# Altium PCB ersa_board_b.PcbDoc
Units mm, origin at the board's own origin, x right, y up, seen from the top; angles counter-clockwise.
Board outline 29 x 81.5 mm, 2 copper layers (Top Layer, Bottom Layer); 69 components, 63 nets, 232 pads, 80 vias.
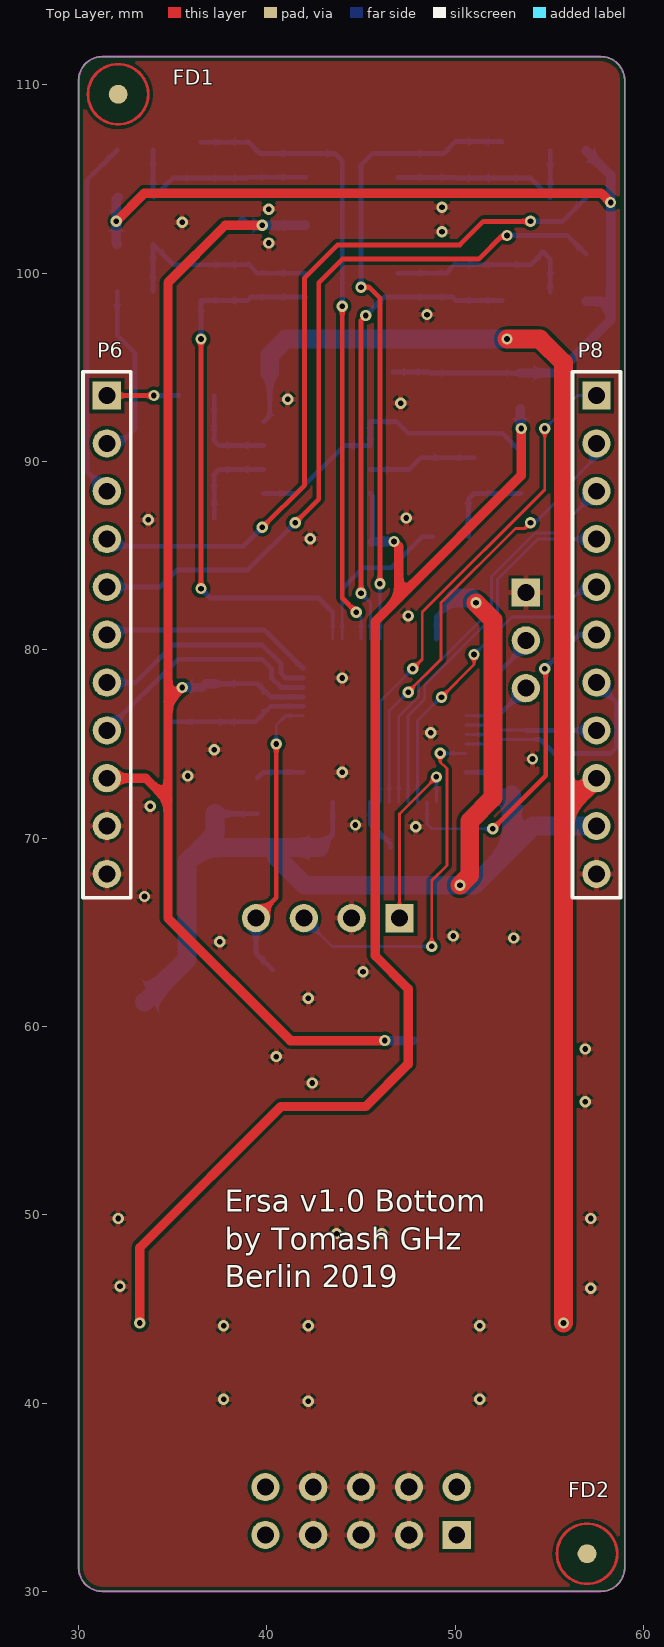
[diagram p0: Top Layer view]
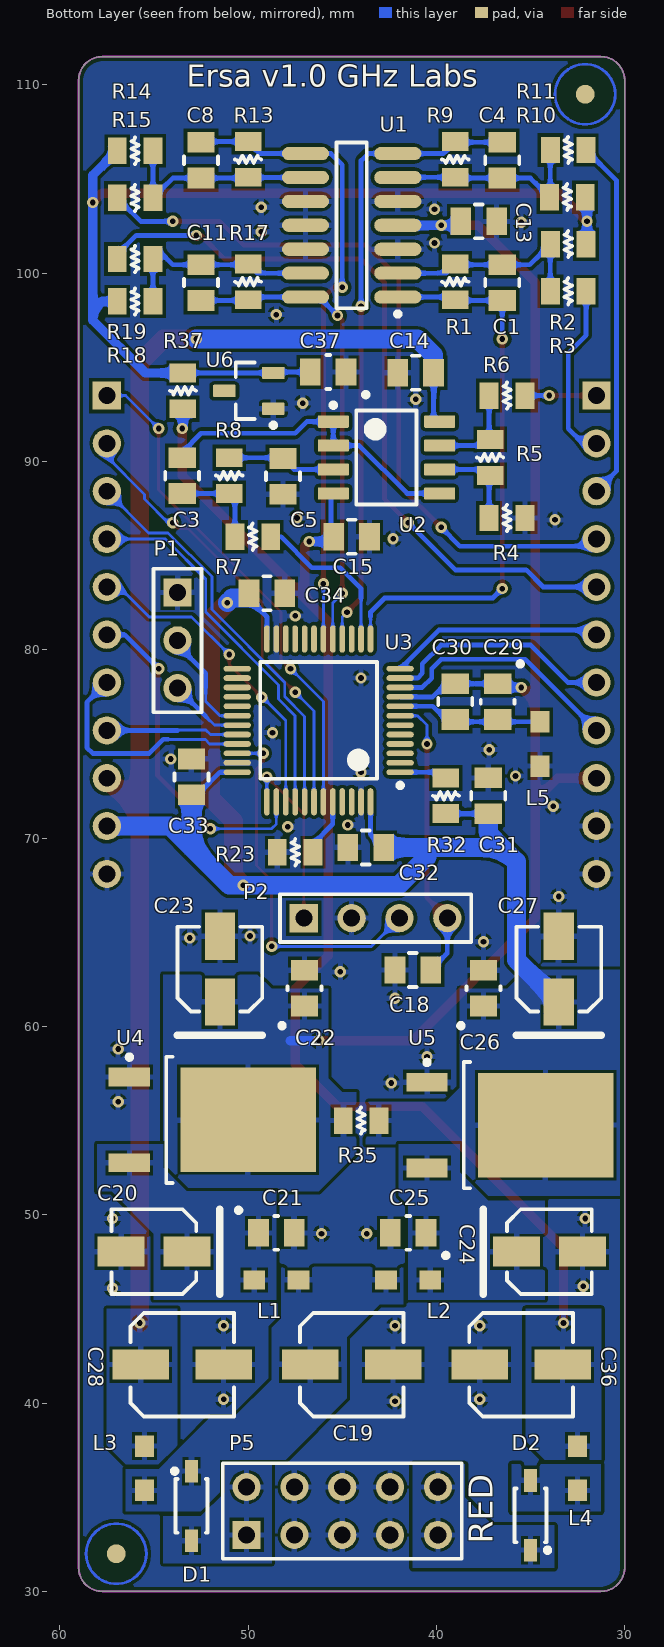
[diagram p1: Bottom Layer view, seen from below]
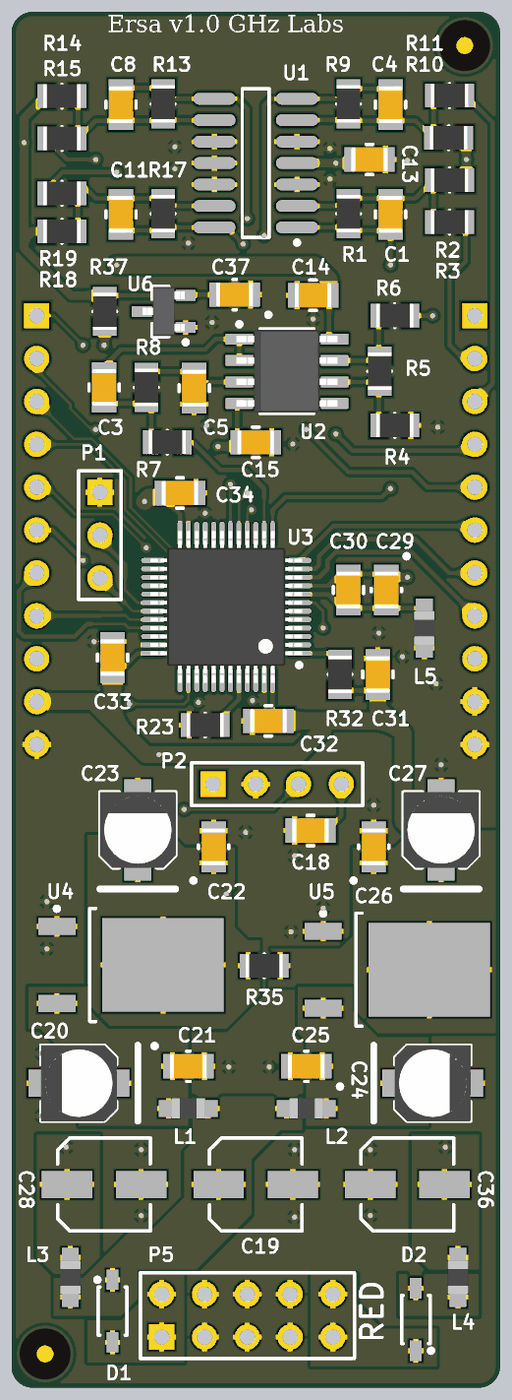
[diagram p2: 3D render of the assembled board from below, using the file's embedded part models]

## Layer stack, top to bottom
Top Solder: solder mask 0.0102, Solder Resist, Dk 3.5
Top Layer: signal copper 0.0356
Dielectric 1: dielectric 0.32, FR-4, Dk 4.8
Bottom Layer: signal copper 0.0356
Bottom Solder: solder mask 0.0102, Solder Resist, Dk 3.5

## Board outline
30,31.27 30,110.23 cw(c31.27,110.23) 31.27,111.5 57.73,111.5 cw(c57.73,110.23) 59,110.23 59,31.27 cw(c57.73,31.27) 57.73,30 31.27,30 cw(c31.27,31.27)

## Design rules (kind name [scope] priority, off if disabled: settings)
BoardOutlineClearance [All] p1: gap=0.254 ignorepadtopadclearanceinfootprint=FALSE except(0: Arc-SplitContinuation Track-SplitContinuation SMDPad-SplitContinuation THPad-SplitContinuation Via-SplitContinuation Fill-SplitContinuation Poly-SplitContinuation Region-SplitContinuation Text-SplitContinuation)
Clearance [All] p1: gap=0.18 ignorepadtopadclearanceinfootprint=FALSE
ComponentClearance [All] p1 off: gap=0.254 collisioncheckmode=3 verticalgap=0.254 showdistances=FALSE
HoleSize [All] p1: absolutevalues=TRUE maxlimit=6.3 minlimit=0.3 maxpercent=80.000 minpercent=20.000
MinimumAnnularRing [All] p1: minimumring=0.15
MinimumSolderMaskSliver [All] p1: minsoldermaskwidth=0.15
PlaneConnect [All] p1: planeconnectstyle=Direct reliefexpansion=0.508 reliefentries=4 reliefconductorwidth=0.254 reliefairgap=0.254
PolygonConnect [All] p1: connectstyle=Relief reliefconductorwidth=0.3 reliefentries=4 polygonreliefangle="90 Angle" airgapwidth=0.15
RoutingVias [All] p1: holewidth=0.3 width=0.6 viastyle="Through Hole" minholewidth=0.3 minwidth=0.6 maxholewidth=0.3 maxwidth=0.6
SilkToSilkClearance [All] p1 off: silktosilkclearance=0.254
SilkToSolderMaskClearance [IsPad] p1 off: minsilkscreentomaskgap=0.254 clearancetoexposedcopper=TRUE
SolderMaskExpansion [All] p1: expansion=0.102
UnConnectedPin [All] p1:
Width [All] p1: maxlimit=1 minlimit=0.15 preferedwidth=0.254
24 further rules are at their usual default settings.

## Classes and differential pairs
component class ersa_schematics_digital: C18 C19 C20 C21 C22 C23 C24 C25 C26 C27 C28 C29 C30 C31 C32 C33 C34 C36 C37 D1 D2 FD1 FD2 L1 L2 L3 L4 L5 P1 P2 P5 P6 P8 R23 R32 R35 R37 U4 U5 U6
component class ersa_schematics_analog: C1 C3 C4 C5 C8 C11 C13 C14 C15 R1 R2 R3 R4 R5 R6 R7 R8 R9 R10 R11 R13 R14 R15 R17 R18 R19 U1 U2

## Components (designator, comment, footprint, x,y, rotation, side; value= is the part's Value field where it differs from the comment)
C1 "20pF" CAPA_0805 36.5,99.5 r270 bottom
C3 "1nF" CAPA_0805 53.5,89.25 r90 bottom
C4 "20pF" CAPA_0805 36.5,106 r90 bottom
C5 "1nF" CAPA_0805 48.15,89.21 r90 bottom
C8 "20pF" CAPA_0805 52.5,106 r90 bottom
C11 "20pF" CAPA_0805 52.5,99.5 r270 bottom
C13 "100nF" CAPA_0805 37.75,102.75 r180 bottom
C14 "100nF" CAPA_0805 41.1,94.71 r0 bottom
C15 "100nF" CAPA_0805 44.5,86 r180 bottom
C18 "100nF" CAPA_0805 41.25,63 r0 bottom
C19 "UUD1C220MCL1GS" NIC-CAPA2-5X5.8_V 44.5,42.04 r180 bottom
C20 "EEE-FK1V100UR" PNSC-FK-V-B_V 55,48.04 r0 bottom
C21 "1uF" "CAPA_0805 Pol" 48.5,49.04 r180 bottom
C22 "1uF" "CAPA_0805 Pol" 47,62.04 r90 bottom
C23 "EEE-FK1V100UR" PNSC-FK-V-B_V 51.5,63.04 r90 bottom
C24 "EEE-FK1V100UR" PNSC-FK-V-B_V 34,48.04 r180 bottom
C25 "1uF" "CAPA_0805 Pol" 41.5,49.04 r0 bottom
C26 "1uF" "CAPA_0805 Pol" 37.5,62.04 r90 bottom
C27 "EEE-FK1V100UR" PNSC-FK-V-B_V 33.5,63.04 r90 bottom
C28 "UUD1C220MCL1GS" NIC-CAPA2-5X5.8_V 53.5,42.04 r180 bottom
C29 "1uF" "CAPA_0805 Pol" 36.75,77.25 r270 bottom
C30 "100nF" CAPA_0805 39,77.25 r270 bottom
C31 "100nF" CAPA_0805 37.25,72.25 r90 bottom
C32 "100nF" CAPA_0805 43.75,69.5 r0 bottom
C33 "100nF" CAPA_0805 53,73.25 r90 bottom
C34 "100nF" CAPA_0805 49,83 r180 bottom
C36 "UUD1C220MCL1GS" NIC-CAPA2-5X5.8_V 35.5,42.04 r180 bottom
C37 "1uF" "CAPA_0805 Pol" 45.75,94.75 r0 bottom
D1 "1N5819HW-7-F" DIOD-SOD-123-2_V 53,34.54 r90 bottom
D2 "1N5819HW-7-F" DIOD-SOD-123-2_V 35,34.04 r270 bottom
FD1 "FIDUCIAL" FIDUCIAL 32.1,109.5 r0 top
FD2 "FIDUCIAL" FIDUCIAL 57,32 r0 top
L1 "742792011" SMD-0805 48.5,46.54 r0 bottom
L2 "742792011" SMD-0805 41.5,46.54 r180 bottom
L3 "742792011" SMD-0805 55.5,36.54 r90 bottom
L4 "742792011" SMD-0805 32.5,36.54 r90 bottom
L5 "742792011" SMD-0805 34.5,75 r90 bottom
P1 "Header 3" HDR1X3 53.75,83.04 r270 bottom
P2 "Header 4" HDR1X4 47.04,65.75 r180 bottom
P5 "Header 5X2" HDR2X5 50.08,33 r180 bottom
P6 "Header 11" HDR1X11 31.5,93.5 r270 top locked
P8 "Header 11" HDR1X11 57.5,93.5 r270 top locked
R1 "33k" RES_0805 39,99.54 r90 bottom
R2 "200k" RES_0805 33,101.54 r180 bottom
R3 "100k" RES_0805 33,99.04 r180 bottom
R4 "33k" RES_0805 36.25,87 r180 bottom
R5 "68k" RES_0805 37.15,90.21 r270 bottom
R6 "1k" RES_0805 36.25,93.5 r0 bottom
R7 "6k2" RES_0805 49.75,86 r180 bottom
R8 "6k2" RES_0805 51,89.25 r270 bottom
R9 "33k" RES_0805 39,106.04 r270 bottom
R10 "200k" RES_0805 33.05,104.04 r180 bottom
R11 "100k" RES_0805 33,106.54 r180 bottom
R13 "33k" RES_0805 50,106.04 r270 bottom
R14 "200k" RES_0805 56,106.5 r0 bottom
R15 "100k" RES_0805 56,104 r0 bottom
R17 "33k" RES_0805 50,99.54 r90 bottom
R18 "200k" RES_0805 56,98.5 r0 bottom
R19 "100k" RES_0805 56,100.75 r0 bottom
R23 "10k" RES_0805 47.5,69.25 r0 bottom
R32 "0R" RES_0805 39.5,72.25 r270 bottom
R35 "0R" RES_0805 44,55 r180 bottom
R37 "2k2" RES_0805 53.46,93.75 r270 bottom
U1 "MCP6004-E/SL" SOIC-SL14_M 44.501,102.54 r0 bottom
U2 "TL072ACD" D0008A_M 42.65,90.211 r180 bottom
U3 "STM32L443CC" "LQFP48 - STM32L443CC" 46.25,76.25 r0 bottom
U4 "LM1117DTX-3.3" TD03B_M 51.9,55.04 r180 bottom
U5 "LM1117DTX-3.3" TD03B_M 36.1,54.76 r180 bottom
U6 "LM4040B10IDBZT" DBZ0003A_M 49.96,93.75 r0 bottom

## Footprints (in the part's own frame and the unit in brackets; to place one, negate y for a bottom-side part, rotate by r counter-clockwise, add the part's x,y. Pads: shape width x height; smd on the part's side, far side on the other; paste and mask are expansions set on the pad)
CAPA_0805 [mm]
  rect 1.1x1.45 smd: 1(-0.95,0) 2(0.95,0)
  silkscreen extent -0.2,-0.9 0.2,0.9, body extent -1.1,-0.72 1.1,0.72, height 0.5
"CAPA_0805 Pol" [mm]
  rect 1.1x1.45 smd: 1(-0.95,0) 2(0.95,0)
  silkscreen extent -2.13,-0.9 0.1,1.32, body extent -1.1,-0.72 1.1,0.72, height 0.5
D0008A_M [mm] "SOIC, 8-Leads, Body 5x4mm, Pitch 1.27mm, IPC Low Density"
  rrect15% 1.65x0.65 smd: 1(-2.825,1.905) 2(-2.825,0.635) 3(-2.825,-0.635) 4(-2.825,-1.905) 5(2.825,-1.905) 6(2.825,-0.635) 7(2.825,0.635) 8(2.825,1.905)
  silkscreen extent -2.95,-2.5 1.6,2.9, body extent -3,-2.45 3,2.45, height 1.63
DBZ0003A_M [mm] "SOT23, 3-Leads, Body 3.04x1.4mm, Pitch 0.95mm, IPC Low Density"
  rrect15% 1.2x0.65 smd: 1(-1.3,0.95) 2(-1.3,-0.95) 3(1.3,0)
  silkscreen extent -1.42,-1.5 0.7,1.95, body extent -1.26,-1.46 1.26,1.46, height 0.96
DIOD-SOD-123-2_V [mm] "SOD-123, 2-Leads, Body 2.85x1.7mm (max), Pitch 3.7mm"
  rect 1.2x0.7 smd: 1(-1.85,0) 2(1.85,0)
  silkscreen extent -1.43,-0.85 1.97,1.03, body extent -1.42,-0.85 1.43,0.85, height 1.45
FIDUCIAL [mm] "Fiducial - Round 1mm Top-Bottom"
  round 1 all layers, no hole paste+0 mask+1: 0(0,0)
  Top Layer circle w0.15: c0,0 r1.6
  Bottom Layer circle w0.15: c0,0 r1.6
HDR1X3 [mm] "Connector; Header; 3 Position"
  rect 1.5x1.5 hole 0.9: 1(0,0)
  round 1.5 hole 0.9: 2(2.54,0) 3(5.08,0)
  silkscreen extent -1.27,-1.27 6.35,1.27
HDR1X4 [mm] "Connector; Header; 4 Position"
  rect 1.5x1.5 hole 0.9: 1(0,0)
  round 1.5 hole 0.9: 2(2.54,0) 3(5.08,0) 4(7.62,0)
  silkscreen extent -1.27,-1.27 8.89,1.27
HDR1X11 [mm] "Connector; Header; 11 Position"
  rect 1.5x1.5 hole 0.9: 1(0,0)
  round 1.5 hole 0.9: 2(2.54,0) 3(5.08,0) 4(7.62,0) 5(10.16,0) 6(12.7,0) 7(15.24,0) 8(17.78,0) 9(20.32,0) 10(22.86,0) 11(25.4,0)
  silkscreen extent -1.27,-1.27 26.67,1.27
HDR2X5 [mm] "Connector; Header; 5x2 Position"
  rect 1.5x1.5 hole 0.9: 1(0,0)
  round 1.5 hole 0.9: 2(0,2.54) 3(2.54,0) 4(2.54,2.54) 5(5.08,0) 6(5.08,2.54) 7(7.62,0) 8(7.62,2.54) 9(10.16,0) 10(10.16,2.54)
  silkscreen extent -1.27,-1.27 11.43,3.81
"LQFP48 - STM32L443CC" [mm] "TSQFP, 48-Leads, Body 7.00x7.00mm, Pitch 0.50mm, IPC Low Density"
  oval 1.45x0.3 smd mask+0.051: 1(-4.325,2.75) 2(-4.325,2.25) 3(-4.325,1.75) 4(-4.325,1.25) 5(-4.325,0.75) 6(-4.325,0.25) 7(-4.325,-0.25) 8(-4.325,-0.75) 9(-4.325,-1.25) 10(-4.325,-1.75) 11(-4.325,-2.25) 12(-4.325,-2.75) 25(4.325,-2.75) 26(4.325,-2.25) 27(4.325,-1.75) 28(4.325,-1.25) 29(4.325,-0.75) 30(4.325,-0.25) 31(4.325,0.25) 32(4.325,0.75) 33(4.325,1.25) 34(4.325,1.75) 35(4.325,2.25) 36(4.325,2.75)
  oval 0.3x1.45 smd mask+0.051: 13(-2.75,-4.325) 14(-2.25,-4.325) 15(-1.75,-4.325) 16(-1.25,-4.325) 17(-0.75,-4.325) 18(-0.25,-4.325) 19(0.25,-4.325) 20(0.75,-4.325) 21(1.25,-4.325) 22(1.75,-4.325) 23(2.25,-4.325) 24(2.75,-4.325) 37(2.75,4.325) 38(2.25,4.325) 39(1.75,4.325) 40(1.25,4.325) 41(0.75,4.325) 42(0.25,4.325) 43(-0.25,4.325) 44(-0.75,4.325) 45(-1.25,4.325) 46(-1.75,4.325) 47(-2.25,4.325) 48(-2.75,4.325)
  silkscreen extent -4.45,-3.1 3.1,3.57, body extent -4.5,-4.5 4.5,4.5, height 1.6
NIC-CAPA2-5X5.8_V [mm] "Aluminum Electrolytic Capacitor, Diameter 5mm, Height 6.1mm, Pitch 4.4mm"
  rect 3x1.6 smd: 1(-2.2,0) 2(2.2,0)
  silkscreen extent -2.75,-2.75 2.75,2.75, body extent -2.5,-2.5 2.5,2.5, height 6.1
PNSC-FK-V-B_V [mm] "CAPAE, 2-Leads, Body 4.50x4.50mm"
  rect 2.5x1.6 smd: 1(-1.75,0) 2(1.75,0)
  silkscreen extent -3.5,-2.25 2.25,2.25, body extent -2.75,-2.25 2.75,2.25, height 6.1
RES_0805 [mm] "0805 Chip Resistor, 2-Leads, Body 2.05x1.25mm, IPC Medium Density"
  rect 1x1.4 smd: 1(-0.95,0) 2(0.95,0)
  silkscreen extent -0.2,-0.7 0.2,0.7, body extent -1.1,-0.7 1.1,0.7, height 0.5
SMD-0805 [mm] "Chip Inductor, 2-Leads, Body 2.0x1.2mm"
  rect 1.15x1 smd: 1(-1.175,0) 2(1.175,0)
  body extent -1,-0.6 1,0.6, height 0.89
SOIC-SL14_M [mm] "SOIC, 14-Leads, Body 8.7x3.9mm, Pitch 1.27mm, IPC Low Density"
  oval 2.5x0.7 smd: 1(-2.45,3.81) 2(-2.45,2.54) 3(-2.45,1.27) 4(-2.45,0) 5(-2.45,-1.27) 6(-2.45,-2.54) 7(-2.45,-3.81) 8(2.45,-3.81) 9(2.45,-2.54) 10(2.45,-1.27) 11(2.45,0) 12(2.45,1.27) 13(2.45,2.54) 14(2.45,3.81)
  silkscreen extent -2.57,-4.4 0.8,4.83, body extent -2,-4.38 2,4.38, height 1.75
TD03B_M [mm] "D-PAK, 4-Leads, Body 6.1x6.6mm, Pitch 2.29mm, Lead Span 9.7mm, IPC Low Density"
  rect 2.2x1 smd: 1(-4.4,2.28) 3(-4.4,-2.28)
  rect 7.2x5.55 smd: 4(1.9,0)
  silkscreen extent -4.52,-3.35 -2.1,3.45, body extent -2.45,-3.35 3.75,3.35, height 2.38

## Part data
C1 C3 C4 C5 C8 C11 C13 C14 C15 C18 C30 C31 C32 C33 C34: library part Cap, "Capacitor", LatestRevisionDate=17-Jul-2002, LatestRevisionNote="Re-released for DXP Platform.", PackageDescription="Radial Cap, Thru-Hole; 2 Leads; 0.3 in Pin Spacing", PackageReference=RAD-0.3, Published=8-Jun-2000, Publisher="Altium Limited"
C19 C28 C36: library part CMP-0687-00027-1, "Aluminum Electrolytic Capacitor, UD Series, Low Impedance, 22 uF, 16 V, + / - 20%, -55 to 105 degC, Chip Type, 5 x 5.8 mm D x L, Pb-Free, Reel", Manufacturer=Nichicon, Rated Capacitance="22 uF", Rated Ripple Current (at 100kHz)="150 mA", Rated Voltage="16 V", Tolerance Rated Capacitance="-20 to 20%", ComponentLink1Description="Manufacturer URL", ComponentLink1URL=http://www.nichicon.co.jp/, ComponentLink2Description=Datasheet, ComponentLink2URL=http://products.nichicon.co.jp/en/pdf/XJA043/e-ud.pdf, ComponentLink3Description="Package Specification", ComponentLink3URL=http://products.nichicon.co.jp/en/pdf/XJA043/e-ud.pdf, DatasheetVersion=08/2012, Diameter="5 mm", Endurance Time="2000 h", Impedance="0.76 Ohm", Length="5.8 mm", Mounting Technology="Surface Mount", PackageDescription="2-Pin Surface Mount Device, Diameter 5 mm, Height 5.8 mm, Pitch 4.4 mm", PackageReference=CAPAE-D5H5.8, Packing="Dia382mm Reel", PartNumber=UUD1C220MCL1GS, RoHS=TRUE
C20 C23 C24 C27: library part CMP-2000-06211-1, "Aluminum Electrolytic Capacitor, 10 uF, +/- 20%, 35 V, 2-Pin SMD (Size Code B), -55 to 105 degC, RoHS, Tape and Reel", Capacitance=10µF, Case Size/Dimension=Ø4x5.8mm, Lifetime@Temperature=2000Hrs@105°C, Manufacturer=Panasonic, Operating Temp-Max=105°C, Operating Temp Range=-55to+105°C, Package Description="2-Pin Electrolytic Aluminum Capacitor, Body 4.3 x 4.3 mm", Package Reference=FK-V-B, Rated Voltage=35V, Ripple Current=90mA, Datasheet URL=http://industrial.panasonic.com/cdbs/www-data/pdf/RDE0000/ABA0000C1181.pdf, Datasheet Version=03/2016, Impedance=1.35O, Manufacturer URL=http://www.panasonic.com/, Mounting Technology=SurfaceMount, Package URL=http://industrial.panasonic.com/cdbs/www-data/pdf/RDE0000/DME0000COL48.pdf, Series=FK, Type=Can
C21 C22 C25 C26 C29 C37: library part "Cap Pol2", "Polarized Capacitor", Manufacturer="Murata Electronics", PartNumber=GRM21BR61C105KA01L, Mouser=http://www.mouser.de/ProductDetail/Murata-Electronics/GRM21BR61C105KA01L/?qs=sGAEpiMZZMs0AnBnWHyRQHqtMhGnfkOVy3Os4ZS1iuU%3d
D1 D2: library part CMP-0303-00003-1, "1.0 A Surface Mount Schottky Barrier Rectifier, 40 V, -65 to 125 degC, 2-Pin SOD-123 Package, RoHS, Tape and Reel", @ Terminal Temperature TT (degC)=90, Forward Voltage Drop VF (V)=0.45, Manufacturer="Diodes Inc", Maximum Average Rectified Current IO (A)=1, Maximum Reverse Current IR (uA)=50, Operating and Storage Temperature Range="-65 to 125 degC", Peak Forward Surge Current IFSM (A)=25, Peak Repetitive Reverse Voltage VRRM (V)=40, @ IF (A)=1, @ VR (V)=40, ComponentLink1Description="Manufacturer URL", ComponentLink1URL=http://www.diodes.com/, ComponentLink2Description=Datasheet, ComponentLink2URL=http://www.diodes.com/datasheets/ds30217.pdf, DatasheetVersion="Rev. 15-2", Mounting Technology="Surface Mount", PackageDescription="2-Pin SOD-123, Body 2.7 x 1.55 mm, Pitch 3.7 mm", PackageReference=SOD-123-2, Packing="Tape and Reel", PartNumber=1N5819HW-7-F, RoHS=TRUE, Total Capacitance CT (pF)=50, VR (RMS) (V)=28
FD1 FD2: library part FIDUCIAL_ROUND, "Fiducial - Round 1.5 mm Top-Bottom", Manufacturer="No Vendor", PartNumber=FIDUCIAL
L1 L2 L3 L4 L5: library part CMP-0220-00043-1, "SMD EMI Suppression Ferrite Bead WE-CBF, Z = 10 Ohm", ComponentLink1Description="Manufacturer Link", ComponentLink1URL=http://www.we-online.com, ComponentLink2Description=Datasheet, ComponentLink2URL=http://www.we-online.de/katalog/media/pdf/742792011.pdf, DatasheetVersion=Dec-2005, Impedance="10 Ohm", PackageDescription="Chip Inductor, 2-Leads, Body 2.0 x 1.2 mm", PackageReference=SMD-0805, PackageVersion=2005
P1: "Header, 3-Pin", LatestRevisionDate=17-Jul-2002, LatestRevisionNote="Re-released for DXP Platform.", Publisher="Altium Limited"
P2: "Header, 4-Pin", LatestRevisionDate=17-Jul-2002, LatestRevisionNote="Re-released for DXP Platform.", Publisher="Altium Limited"
P5: "Header, 5-Pin, Dual row", LatestRevisionDate=17-Jul-2002, LatestRevisionNote="Re-released for DXP Platform.", Publisher="Altium Limited"
P6 P8: "Header, 11-Pin", LatestRevisionDate=17-Jul-2002, LatestRevisionNote="Re-released for DXP Platform.", Publisher="Altium Limited"
R1 R4 R9 R13 R17: library part Resistor, "33k 0805", Manufacturer=Susumu, PartNumber=RR1220P-105-D, Mouser=http://www.mouser.de/ProductDetail/Susumu/RR1220P-105-D/?qs=sGAEpiMZZMu61qfTUdNhG%2fDhcyQpRg8MxiYDTLm9lx4%3d
R2 R10 R14 R18: library part Resistor, "200k 0805", Manufacturer=Susumu, PartNumber=RR1220P-105-D, Mouser=http://www.mouser.de/ProductDetail/Susumu/RR1220P-105-D/?qs=sGAEpiMZZMu61qfTUdNhG%2fDhcyQpRg8MxiYDTLm9lx4%3d
R3 R11 R15 R19: library part Resistor, "100k 0805", Manufacturer=Susumu, PartNumber=RR1220P-105-D, Mouser=http://www.mouser.de/ProductDetail/Susumu/RR1220P-105-D/?qs=sGAEpiMZZMu61qfTUdNhG%2fDhcyQpRg8MxiYDTLm9lx4%3d
R5: library part Resistor, "68k 0805", Manufacturer=Susumu, PartNumber=RR1220P-105-D, Mouser=http://www.mouser.de/ProductDetail/Susumu/RR1220P-105-D/?qs=sGAEpiMZZMu61qfTUdNhG%2fDhcyQpRg8MxiYDTLm9lx4%3d
R6: library part Resistor, "1k 0805", Manufacturer=Susumu, PartNumber=RR1220P-105-D, Mouser=http://www.mouser.de/ProductDetail/Susumu/RR1220P-105-D/?qs=sGAEpiMZZMu61qfTUdNhG%2fDhcyQpRg8MxiYDTLm9lx4%3d
R7 R8: library part Resistor, "6k2 0805", Manufacturer=Susumu, PartNumber=RR1220P-105-D, Mouser=http://www.mouser.de/ProductDetail/Susumu/RR1220P-105-D/?qs=sGAEpiMZZMu61qfTUdNhG%2fDhcyQpRg8MxiYDTLm9lx4%3d
R23: library part Resistor, "10k 0805", Manufacturer=Susumu, PartNumber=RR1220P-105-D, Mouser=http://www.mouser.de/ProductDetail/Susumu/RR1220P-105-D/?qs=sGAEpiMZZMu61qfTUdNhG%2fDhcyQpRg8MxiYDTLm9lx4%3d
R32 R35: library part Resistor, "0R 0805", Manufacturer=Susumu, PartNumber=RR1220P-104-D, Mouser=http://www.mouser.de/ProductDetail/Susumu/RR1220P-104-D/?qs=sGAEpiMZZMu61qfTUdNhG%2fDhcyQpRg8MUHr%252b%2fl2FgBo%3d
R37: library part Resistor, "2k2 0805", Manufacturer=Susumu, PartNumber=RR1220P-103-D, Mouser=http://www.mouser.de/ProductDetail/Susumu/RR1220P-103-D/?qs=sGAEpiMZZMu61qfTUdNhG%2fDhcyQpRg8MdkVTtHR2gV4%3d
U1: "1 MHz, Low-Power Operational Amplifier, 14-Pin SOIC, Extended Temperature", Manufacturer="Microchip Technology", PartNumber=MCP6004T-E/SL, Supplier Part Number 1=MCP6004-E/SL-ND, Code_IPC=SOIC127P600-14, Code_JEDEC=MS-012-AB, ComponentLink1Description=Datasheet, ComponentLink1URL=http://ww1.microchip.com/downloads/en/DeviceDoc/21733j.pdf, ComponentLink2Description="Packaging Specification", ComponentLink2URL=http://www.microchip.com/stellent/groups/techpub_sg/documents/packagingspec/en012702.pdf, ComponentLink3Description="Microchip.com Home", ComponentLink3URL=http://www.microchip.com/, DatasheetVersion="revJ, Nov-2009", LatestRevisionDate=02-Dec-2009, LatestRevisionNote="Updated to datasheet revision J, Nov-2009", Mouser=http://www.mouser.de/ProductDetail/Microchip-Technology/MCP6004T-E-SL/?qs=sGAEpiMZZMtCHixnSjNA6N5WMYiF%252b1miedbE5%2f40CfM%3d, PackageDescription="14-Lead Plastic Small Outline (SL) - Narrow, 3.90mm Body [SOIC]", PackageReference=SOIC-SL14, PackageVersion="revBB, Aug-2009", Published=29-Jan-2009, Publisher="Altium Limited", Supplier 1=Digi-Key, Supplier 2=Farnell, Supplier Part Number 2=1332122
U2: library part CMP-0015-00092-2, "Low-Noise JFET-Input Operational Amplifier, 7 to 36 V, 0 to 70 degC, 8-pin SOIC (D8), Green (RoHS & no Sb/Br)", Manufacturer="Texas Instruments", Rating=Catalog, Total Supply Voltage(Max)(+5V is 5, +/-5V is 10)=36, Total Supply Voltage(Min)(+5V is 5, +/-5V is 10)=7, CMRR(Min)(dB)=75, Code_JEDEC=MS-012, ComponentLink1Description="Manufacturer URL", ComponentLink1URL=http://www.ti.com/, ComponentLink2Description=Datasheet, ComponentLink2URL=http://www.ti.com/lit/ds/symlink/tl072a.pdf, ComponentLink3Description="Package Specification", ComponentLink3URL=http://www.ti.com/litv/pdf/msoi002j, DatasheetVersion=SLOS080J, Eco-Plan="Green (RoHS & no Sb/Br)", GBW(Typ)(MHz)=3, IIB(Max)(pA)=200, Iq per channel(Max)(mA)=2.5, Mounting Technology="Surface Mount", Number of Channels=2, Offset Drift(Typ)(uV/C)=18, PackageDescription="8-Pin Plastic Small Outline, Body 4.9 x 3.9 mm, Pitch 1.27 mm", PackageReference=D0008A, PackageVersion="4040047-3/M, 06/2011", PartNumber=TL072ACD, Slew Rate(Typ)(V/us)=13, Sub Family="General Purpose Amplifier, High Supply Voltage Amplifier (>=30V)", Vio (25C)(Max)(mV)=6, Vn at 1kHz(Typ)(nV/rtHz)=18
U3: "STM32L443CC - Ultra-low-power Arm® Cortex®-M4 32-bit MCU+FPU, 100DMIPS, 256KB Flash, 64KB RAM", Manufacturer=STMicroelectronics, PartNumber=STM32L443CCTx, Datasheet=https://www.st.com/resource/en/datasheet/stm32l443cc.pdf, Mouser=https://www.mouser.de/ProductDetail/STMicroelectronics/STM32L443CCT6?qs=%2Fha2pyFaduhGuWxD2vAUOIKmdrxmyCPabulFEtM2oEugz2cHqjXy8g%3D%3D
U4 U5: library part CMP-0062-00706-2, "800mA Low-Dropout Linear Regulator, 3-pin TO-252", Manufacturer="National Semiconductor", PackageTopMarking=NSUZXYTT*LM1117*DT-3.3, PowerWise=N, Code_JEDEC=TO-252-AA, ComponentLink1Description="LM1117 Datasheet", ComponentLink1URL=http://www.national.com/ds/LM/LM1117.pdf, ComponentLink2Description="LM1117 Web Page", ComponentLink2URL=http://www.national.com/pf/LM/LM1117.html, ComponentLink3Description="TD03B Package Page", ComponentLink3URL=http://www.national.com/packaging/folders/td03b.html, CompType="LDO IC", DatasheetVersion=Apr-2006, PackageDescription="TO252, Molded, Jedec, 6.8 x 6.10 x 2.30mm Body, 3 Lead, 2.28mm Pitch, Surface Mount", PackageReference=TD03B, PackageVersion="revD, Feb-2009", PinCount=3, RevisionNote="Component URLs added", RoHS=N
U6: library part CMP-0366-01043-2, "Precision Micropower Shunt Voltage Reference, 0.2% Accuracy, 10 V, 15 ppm / degC, 15 mA, -40 to 85 degC, 3-pin SOT-23 (DBZ), Green (RoHS & no Sb/Br)", Manufacturer="Texas Instruments", Rating=Catalog, Temp Coeff(Max)(ppm/ degree C)=100, Temp Coeff(Typ)(ppm/ degree C)=15, Code_JEDEC=TO-236, ComponentLink1Description="Manufacturer URL", ComponentLink1URL=http://www.ti.com/, ComponentLink2Description=Datasheet, ComponentLink2URL=http://www.ti.com/general/docs/lit/getliterature.tsp?genericPartNumber=LM4040B10&fileType=pdf, ComponentLink3Description="Package Specification", ComponentLink3URL=http://www.ti.com/litv/pdf/mpds108a, ComponentLink4Description="URL Link1", ComponentLink4URL="Samples URL:http://www.ti.com/product/lm4040b10", DatasheetVersion=SLOS456K, Eco-Plan="Green (RoHS & no Sb/Br)", Initial Accuracy @ 25/deg C(%)=0.2, Iout/Iz(Max)(mA)=15, Min Iz for Regulation(uA)=100, Mounting Technology="Surface Mount", PackageDescription="3-Pin Plastic Small Outline, Body 2.92 x 1.3 mm, Pitch 0.95 mm", PackageReference=DBZ0003A, PackageVersion=4203227/B, PartNumber=LM4040B10IDBZT, SubFamily="Shunt Voltage Reference", VO(V)=10

## Via types
v1: diameter 0.6, hole 0.3, Top Layer to Bottom Layer, tented both sides, 80 vias

## Nets (pads, with @x,y where several pads share a name; then routed paths per layer and width w, separated by ;. In a path a pad name is that pad's centre, name@x,y a point inside that pad or via, vN(x,y) a via of type N, cw(c..) or ccw(c..) an arc to the next point about the centre after c; other vN are vias at no path point)
3V3: C26.1 C27.1 C31.1 C32.1 C33.1 C34.1 P8.10 R32.2 R35.2 U3.24 U3.36 U3.48 U5.4 | length 67.6
  Top Layer w1: v1(50.25,67.5) 50.77,68.02 50.77,70.906 52,72.136 52,81.6 v1(51.1,82.5) ; P8.10@57.39,70.75 P8.10
  Bottom Layer w0.254: C31.1 R32.2 ; C32.1 43.5,70.2 U3.48 ; U3.24 49,81.75 C34.1@50,82.75 ; U3.36 51.5,73.5 52.5,72.5 C33.1@52.7,72.5
  Bottom Layer w1: C27.1 35.75,63.54 35.75,68.75 36.5,69.5 ; C31.1 37.25,70.25 36.5,69.5 ; C32.1 40.5,69.5 ; C34.1@50,82.75 50.85,82.75 v1(51.1,82.5) ; C33.1 53,69.5 ; P8.10 54.14,70.64 53,69.5 ; 36.5,69.5 40.5,69.5 ; 40.5,69.5 40.5,69 42,67.5 v1(50.25,67.5) 51,67.5 53,69.5
3V3A: C13.1 C22.1 C23.1 C29.1 C30.1 P6.9 R35.1 U1.4 U3.9 U4.4 | length 70.7
  Top Layer w0.5: P6.9 33.57,73.18 34.75,72 ; v1(35.5,78) 34.75,77.25 ; v1(39.75,102.54) 37.79,102.54 34.75,99.5 34.75,77.25 ; v1(46.25,59.25) 41.25,59.25 34.75,65.75 34.75,72 ; 34.75,72 34.75,77.25
  Bottom Layer w0.254: C29.1@37.25,78.2 C30.1 39.5,78.2 40.2,77.5 U3.9
  Bottom Layer w0.5: v1(35.5,78) 36.55,78 C29.1 C29.1@37.25,78.2 ; C13.1 38.91,102.54 v1(39.75,102.54) U1.4 ; v1(46.25,59.25) 47.75,59.25
AREF_-10: C37.2 R2.2 R10.2 R14.2 R18.2 R37.1 U6.2 | length 53.4
  Top Layer w0.5: v1(32,102.75) 33.5,104.25 57.75,104.25 v1(58.25,103.75)
  Bottom Layer w0.254: C37.2 48.61,94.75 U6.2 R37.1
  Bottom Layer w0.5: R2.2 32,101.59 v1(32,102.75) 32,103.94 R10.2 ; R37.1 55.45,94.7 58.25,97.5 58.25,98 ; R18.2 57.75,98.5 58.25,98 ; R14.2 58.25,105.2 v1(58.25,103.75) 58.25,98
CV_FALL: C8.2 R13.1 U1.8 U3.18 | length 33.9
  Top Layer w0.254: v1(45,99.25) 45.443,99.25 46,98.693 v1(46,83.5)
  Bottom Layer w0.15: U3.18 v1(46,83.5)
  Bottom Layer w0.254: v1(45,99.25) 45,105.75 45.6,106.35 U1.8 49.36,106.35 R13.1 52.46,106.99 C8.2
CV_IN: C1.2 R1.1 U1.1 U3.13 | length 29.9
  Top Layer w0.254: v1(36.5,83.25) v1(36.5,96.5)
  Bottom Layer w0.15: U3.13 43.5,81.75
  Bottom Layer w0.254: v1(36.5,83.25) 37,82.75 42.75,82.75 43.5,82 43.5,81.75 ; v1(36.5,96.5) C1.2 38.96,98.55 R1.1 39.14,98.73 U1.1
CV_RISE: C4.2 R9.1 U1.7 U3.16 | length 33.8
  Top Layer w0.254: v1(44,98.25) 44,82.75 v1(44.75,82)
  Bottom Layer w0.15: v1(44.75,82) 45,81.75 U3.16
  Bottom Layer w0.254: C4.2 38.96,106.95 R9.1 39.64,106.35 U1.7 43.625,106.35 44,105.975 v1(44,98.25)
CV_SLOPE: C11.2 R17.1 U1.14 U3.17 | length 25.2
  Top Layer w0.254: v1(45,83) 45,97.5 v1(45.25,97.75)
  Bottom Layer w0.15: v1(45,83) 45.5,82.5 U3.17
  Bottom Layer w0.254: v1(45.25,97.75) 46.23,98.73 U1.14 49.86,98.73 R17.1 50.04,98.55 C11.2
CYC_LED: P8.6 U3.38 | length 18
  Top Layer w0.254: v1(52,70.5) 54.807,73.307 54.807,78.943 v1(54.75,79)
  Bottom Layer w0.15: U3.38 48.5,70.75 48.75,70.5 v1(52,70.5)
  Bottom Layer w0.254: v1(54.75,79) 56.55,80.8 P8.6
DAC: R7.2 U3.14 | length 8.6
  Bottom Layer w0.15: U3.14 44,82.75
  Bottom Layer w0.254: 44,82.75 44,83.25 45.112,84.362 46.612,84.362 48.25,86 R7.2
EOC: P8.2 U3.42 | length 24
  Top Layer w0.15: v1(47.5,77.75) 49.25,79.5 49.25,82.5 53.194,86.444 53.694,86.444 v1(54,86.75)
  Bottom Layer w0.15: U3.42 46.5,76.75 v1(47.5,77.75) ; v1(54,86.75) 54.25,86.75 55.5,88 55.5,88.25 57.5,90.25 P8.2
EOC_LED: P8.7 U3.33 | length 12.4
  Bottom Layer w0.15: U3.33 52.04,75 52.27,75.23 54.23,75.23 54.25,75.25
  Bottom Layer w0.254: 54.25,75.25 54.5,75.25 55.25,74.5 58.25,74.5 58.557,74.807 58.557,77.203 P8.7
GND: C5.1 C13.2 C14.2 C15.2 C18.2 C19.2 C20.2 C21.2 C22.2 C23.2 C24.2 C25.2 C26.2 C27.2 C28.2 C31.2 C32.2 C33.2 C34.2 C36.1 C37.1 L5.1 P1.1 P2.2 P5.3 P5.4 P5.5 P5.6 P5.7 P5.8 P6.10 P6.11 P8.11 R4.2 R23.2 U1.3 U1.5 U1.10 U1.11 U1.12 U3.23 U3.35 U3.47 U4.1 U5.1 U6.1
  other v1: 42.2,40.1 37.7,40.2 51.3,40.2 37.7,44.1 42.2,44.1 51.3,44.1 57.2,46.1 32.2,46.2 43.7,49 46.1,49 32.1,49.8 57.2,49.8 56.9,56 42.4,57 40.5,58.4 56.9,58.8 42.2,61.5 45.1,62.9 37.5,64.5 53.1,64.7 49.9,64.8 33.5,66.9 47.9,70.6 44.7,70.7 33.8,71.7 35.8,73.3 44,73.5 54.1,74.2 37.2,74.7 48.7,75.6 44,78.5 47.5,81.8 42.3,85.9 33.7,86.9 47.4,87 47.1,93.1 41.1,93.3 48.5,97.8 40.1,101.6 49.3,102.2 35.5,102.7 40.1,103.4 49.3,103.5
GNDA: C29.2 C30.2 L5.2 U3.8 | length 7.3
  Bottom Layer w0.254: 35,76.175 39.375,76.175 40.2,77 U3.8
HOLD: P8.4 U3.40 | length 19.9
  Bottom Layer w0.15: U3.40 47.5,76.498 48.385,77.383 48.385,78.135 52.25,82 52.25,83.748 54.382,85.88 P8.4
HOLD_LED: P8.1 U3.43 | length 26.9
  Top Layer w0.15: v1(47.75,79) 48.25,79.5 48.25,82 54.75,88.5 v1(54.75,91.75)
  Bottom Layer w0.15: U3.43 46,77.25 v1(47.75,79) ; v1(54.75,91.75) 56.5,93.5 P8.1
NetC1_1: C1.1 R1.2 R2.1 R3.1 U1.2 | length 11.3
  Bottom Layer w0.254: R3.1 R2.1 35.04,100.45 C1.1 38.96,100.45 R1.2 39.49,100 U1.2
NetC3_1: C3.1 R7.1 R8.2 | length 4.9
  Bottom Layer w0.254: R7.1 50.7,88 R8.2 C3.1
NetC3_2: C3.2 U2.1 U2.2 U2.5 | length 17
  Bottom Layer w0.254: U2.5 41.556,88.306 44.096,90.846 U2.2 U2.1 46.884,92.116 47.5,91.5 52.5,91.5 53.5,90.5 C3.2
NetC4_1: C4.1 R9.2 R10.1 R11.1 U1.6 | length 11
  Bottom Layer w0.254: R11.1 33.95,104.09 R10.1 35.01,105.05 C4.1 38.96,105.05 R9.2 42.041,105.09 U1.6
NetC5_2: C5.2 R8.1 U2.3 | length 5.8
  Bottom Layer w0.254: U2.3 47.565,89.576 C5.2 48.19,90.2 R8.1
NetC8_1: C8.1 R13.2 R14.1 R15.1 U1.9 | length 11
  Bottom Layer w0.254: U1.9 49.99,105.08 50.02,105.05 C8.1 54,105.05 R15.1 R14.1
NetC11_1: C11.1 R17.2 R18.1 R19.1 U1.13 | length 10.5
  Bottom Layer w0.254: U1.13 49.51,100 R17.2 50.04,100.45 C11.1 54,100.45 54.675,101.125 R19.1 R18.1@55.05,99
NetC19_1: C19.1 D1.2 L1.1 L2.1 L3.1
NetC20_1: C20.1 C21.1 L1.2 U4.3
NetC24_1: C24.1 C25.1 L2.2 U5.3
NetD1_1: D1.1 P5.1 P5.2
NetD2_1: D2.1 L4.1
NetD2_2: D2.2 P5.9 P5.10
NetJ6_1: 
NetJ6_2: 
NetJ7_1: 
NetJ8_1: 
NetLED1_1: 
NetLED2_1: 
NetLED3_1: 
NetLED4_1: 
NetQ1_1: 
NetQ2_1: 
NetQ3_1: 
NetQ3_3: 
NetR4_1: R4.1 R5.2 U2.6 | length 5.1
  Bottom Layer w0.254: R4.1 37.2,89.21 R5.2 37.465,89.576 U2.6
NetR5_1: R5.1 R6.2 U2.7 | length 5.2
  Bottom Layer w0.254: R6.2 37.2,91.21 R5.1 37.464,90.846 U2.7
NetR21_2: 
NetR23_1: R23.1 U3.44 | length 2.9
  Bottom Layer w0.254: U3.44 45.5,70.75 46.55,69.7 R23.1@46.55,69.5
NetR32_1: R32.1 U3.1 | length 2.5
  Bottom Layer w0.254: R32.1 39.8,73.5 U3.1
NRST: C18.1 P2.4 U3.7 | length 15.4
  Top Layer w0.254: P2.4 40.5,66.83 v1(40.5,75)
  Bottom Layer w0.15: v1(40.5,75) 40.5,75.25 40.5,76 41,76.5 U3.7
  Bottom Layer w0.254: P2.4 39.42,63.88 C18.1
OUT_LED: P8.8 U3.32 | length 7
  Bottom Layer w0.15: U3.32 52,75.5 52.25,75.75 53.72,75.75 53.75,75.72
  Bottom Layer w0.254: 53.75,75.72 P8.8
OUTPUT: P6.1 R6.1 | length 3.8
  Top Layer w0.254: P6.1 v1(34,93.5)
  Bottom Layer w0.254: v1(34,93.5) R6.1
POT_FALL: P6.7 U3.11 | length 12.3
  Bottom Layer w0.254: P6.7 33.01,78.26 35,80.25 39.75,80.25 40.75,79.25 40.75,78.75 41,78.5 U3.11
POT_RISE: P6.6 U3.12 | length 11
  Bottom Layer w0.254: P6.6@31.75,81.05 39.875,81.05 U3.12
POT_SLOPE: P6.8 U3.10 | length 12.9
  Bottom Layer w0.254: P6.8 35.28,79.5 39.75,79.5 40.25,79 40.25,78.5 40.75,78 U3.10
R_CV_FALL: P6.4 R15.2 | length 39.7
  Top Layer w0.254: v1(39.75,86.5) 42,88.75 42,99.75 43.75,101.5 50.25,101.5 51.5,102.75 v1(54,102.75)
  Bottom Layer w0.254: P6.4 31.88,85.5 38.75,85.5 v1(39.75,86.5) ; v1(54,102.75) 55.7,102.75 R15.2
R_CV_IN: P6.2 R3.2 | length 9.5
  Bottom Layer w0.254: P6.2 32.21,90.96 33,91.75 33,95.75 32.05,96.7 R3.2
R_CV_RISE: P6.3 R11.2 | length 19.2
  Bottom Layer w0.254: P6.3 30.443,89.477 30.443,104.933 R11.2
R_CV_SLOPE: P6.5 R19.2 | length 40.3
  Top Layer w0.254: v1(41.5,86.75) 42.75,88 42.75,99.5 44,100.75 51.25,100.75 52.5,102 v1(52.75,102)
  Bottom Layer w0.254: P6.5 34.34,83.34 35.239,84.239 38.989,84.239 v1(41.5,86.75) ; v1(52.75,102) 52.757,102.007 55.943,102.007 R19.2@56.95,101
RX: P1.3 U3.31 | length 4
  Bottom Layer w0.15: U3.31 51.79,76 52.25,76.46
  Bottom Layer w0.254: 52.25,76.46 P1.3
SW_A: P8.5 U3.39 | length 17.1
  Top Layer w0.15: v1(49.267,77.483) 51,79.215 v1(51,79.75)
  Bottom Layer w0.15: U3.39 48,76.25 49.25,77.5 v1(49.267,77.483) ; v1(51,79.75) 53,81.75 55.25,81.75 56.84,83.34 P8.5
SWCLK: P2.1 U3.37 | length 9.6
  Top Layer w0.15: P2.1 47.04,71.29 v1(49,73.25)
  Bottom Layer w0.15: U3.37 v1(49,73.25)
SWDIO: P2.3 U3.34 | length 19.5
  Top Layer w0.15: v1(48.75,64.25) 48.75,67.75 49.555,68.555 49.555,73.695 49.2,74.05 v1(49.2,74.5)
  Bottom Layer w0.15: P2.3 43.46,64.25 v1(48.75,64.25) ; v1(49.2,74.5) U3.34
TRIGGER: P8.3 U3.41 | length 21.5
  Bottom Layer w0.15: U3.41 47,76.465 48.055,77.52 48.055,78.272 51.92,82.137 51.92,83.885 54.245,86.21 55.29,86.21 P8.3
TX: P1.2 U3.30 | length 5.9
  Bottom Layer w0.15: U3.30 51.5,76.5 52.25,77.25 52.25,78
  Bottom Layer w0.254: 52.25,78 52.25,78.75 53.75,80.25 P1.2
VCC: C14.1 C28.1 L3.2 P8.9 U2.8 | length 73.6
  Top Layer w1: v1(52.75,96.5) 54.5,96.5 55.75,95.25 55.75,71.43 ; v1(55.75,44.25) 55.75,71.43 ; P8.9 55.75,71.43
  Bottom Layer w0.254: U2.8 40.15,92.44 C14.1
  Bottom Layer w1: C14.1 40.15,95.65 41,96.5 v1(52.75,96.5)
VEE: C15.1 C36.2 L4.2 R37.2 U2.4 | length 68
  Top Layer w0.5: v1(33.25,44.25) 33.25,48.25 40.75,55.75 45.25,55.75 47.5,58 47.5,62 45.75,63.75 45.75,81.5 47,82.75 ; v1(46.75,85.75) 47,85.5 47,82.75 ; v1(53.5,91.75) 53.5,89.25 47,82.75
  Bottom Layer w0.254: U2.4 45.6,88.181 C15.1@45.6,85.71
  Bottom Layer w0.5: C15.1@45.6,85.71 45.64,85.75 v1(46.75,85.75) ; R37.2 53.46,91.79 v1(53.5,91.75)
pads on no net: FD1.0 FD2.0 U3.2 U3.3 U3.4 U3.5 U3.6 U3.15 U3.19 U3.20 U3.21 U3.22 U3.25 U3.26 U3.27 U3.28 U3.29 U3.45 U3.46 U6.3

## Polygon pours and split planes (outlines as drawn)
GND on Bottom Layer "GND_L02_P030" (solid, remove dead copper, pour order 30): 30,30 59,30 59,111.5 30,111.5
3V3 on Bottom Layer "3V3_L02_P026" (solid, remove dead copper, pour order 26): 30.25,63 35.25,63 36.25,62 38.75,62 38.75,56.75 39.5,56 43.75,56 43.75,53.75 38.5,53.75 38.5,52 37.5,51 30.25,51
NetC24_1 on Bottom Layer "NETC24_1_L02_P020" (solid, remove dead copper, pour order 20): 42,53.75 38.75,53.75 38.75,52.25 37.25,50.75 34.25,50.75 34.25,45.5 41.5,45.5 41.5,50.5 42,51
NetC20_1 on Bottom Layer "NETC20_1_L02_P018" (solid, remove dead copper, pour order 18): 58,53.75 54.5,53.75 54.5,52.5 53.25,51.25 48.5,51.25 48.5,45.5 55,45.5 55,49 57.25,51.25 58,51.25
VCC on Bottom Layer "VCC_L02_P016" (solid, remove dead copper, pour order 16): 56.5,36.75 57.5,37.75 57.5,45 53.75,45 53.75,37.75 54.75,36.75
VEE on Bottom Layer "VEE_L02_P014" (solid, remove dead copper, pour order 14): 34.25,37 35.25,38 35.25,45 31.25,45 31.25,37
NetC19_1 on Bottom Layer "NETC19_1_L02_P012" (solid, remove dead copper, pour order 12): 53.75,36.25 53.75,37.5 52,39.25 50.75,39.25 48.75,41.25 48.75,43 44.75,43 44.75,40.25 48,37 51.75,37 51.75,36.25
NetC19_1 on Bottom Layer "NETC19_1_L02_P008" (solid, remove dead copper, pour order 8): 41.75,47.25 48.25,47.25 48.25,44.5 48.75,44 48.75,40.25 44.75,40.25 44.75,43.5 43,45.25 41.75,45.25
NetC19_1 on Bottom Layer "NETC19_1_L02_P006" (solid, remove dead copper, pour order 6): 56.5,34.25 56.5,36.5 54.75,36.5 53.75,37.5 51.5,37.5 51.5,35.25 52.5,34.25
NetD2_1 on Bottom Layer "NETD2_1_L02_P004" (solid, remove dead copper, pour order 4): 36,34.25 36,36.75 31.27,36.75 31.27,34.25
NetD2_2 on Bottom Layer "NETD2_2_L02_P002" (solid, remove dead copper, pour order 2): 41.25,36.75 41.25,31.25 33.75,31.25 33.75,33.5 37,33.5 38.5,35 38.5,36.75
NetD1_1 on Bottom Layer "NETD1_1_L02_P000" (solid, remove dead copper, pour order 0): 48.75,36.75 48.75,31.5 54.5,31.5 54.5,34 52.5,34 51.25,35.25 51.25,36.75
3V3A on Bottom Layer "3V3A_L02_P024" (solid, remove dead copper, pour order 24): 49.5,62.75 48.75,62 45.75,62 45.75,57.25 45,56.5 44.25,56.5 44.25,53.25 46.25,51.25 53.25,51.25 54.5,52.5 54.5,62.75
GND on Top Layer "GND_L01_P028" (solid, remove dead copper, pour order 28): 30,30 59,30 59,111.5 30,111.5

## Keep-outs
Keep-Out Layer:
  lines w0.1: 30,31.27 ccw(c31.27,31.27) 31.27,30 35,30 57.73,30 ccw(c57.73,31.27) 59,31.27 59,41 59,106.2 59,110.23 ccw(c57.73,110.23) 57.73,111.5 33.5,111.5 31.27,111.5 ccw(c31.27,110.23) 30,110.23 30,105.9 30,31.27

## Silkscreen, mask and mechanical layers (free items; w line width, h text height)
Top Overlay:
  text "Ersa v1.0 Bottom / by Tomash GHz / Berlin 2019" at 37.75,45.75 h2
Bottom Overlay:
  text "Ersa v1.0 GHz Labs" at 53.25,109.5 h2
Drill Drawing:
  lines w0.1: 30,31.27 ccw(c31.27,31.27) 31.27,30 35,30 57.73,30 ccw(c57.73,31.27) 59,31.27 59,41 59,106.2 59,110.23 ccw(c57.73,110.23) 57.73,111.5 33.5,111.5 31.27,111.5 ccw(c31.27,110.23) 30,110.23 30,105.9 30,31.27

## Dimensions
31.27,30 to 31.27,111.5 on Mechanical 1
30,31.27 to 59,31.27 on Mechanical 1

## Text inside footprints (layer, text, board x,y; h text height)
P5: Bottom Overlay "RED" at 37,32.54 h1.27 r270